# Altium PCB ControlBoard (1).PcbDoc (part 2 of 2)
Units mil, origin at the board's own origin, x right, y up, seen from the top; angles counter-clockwise.
Board outline 4736.14 x 4742.83 mil, 2 copper layers (Top Layer, Bottom Layer); 196 components, 148 nets, 699 pads, 226 vias.
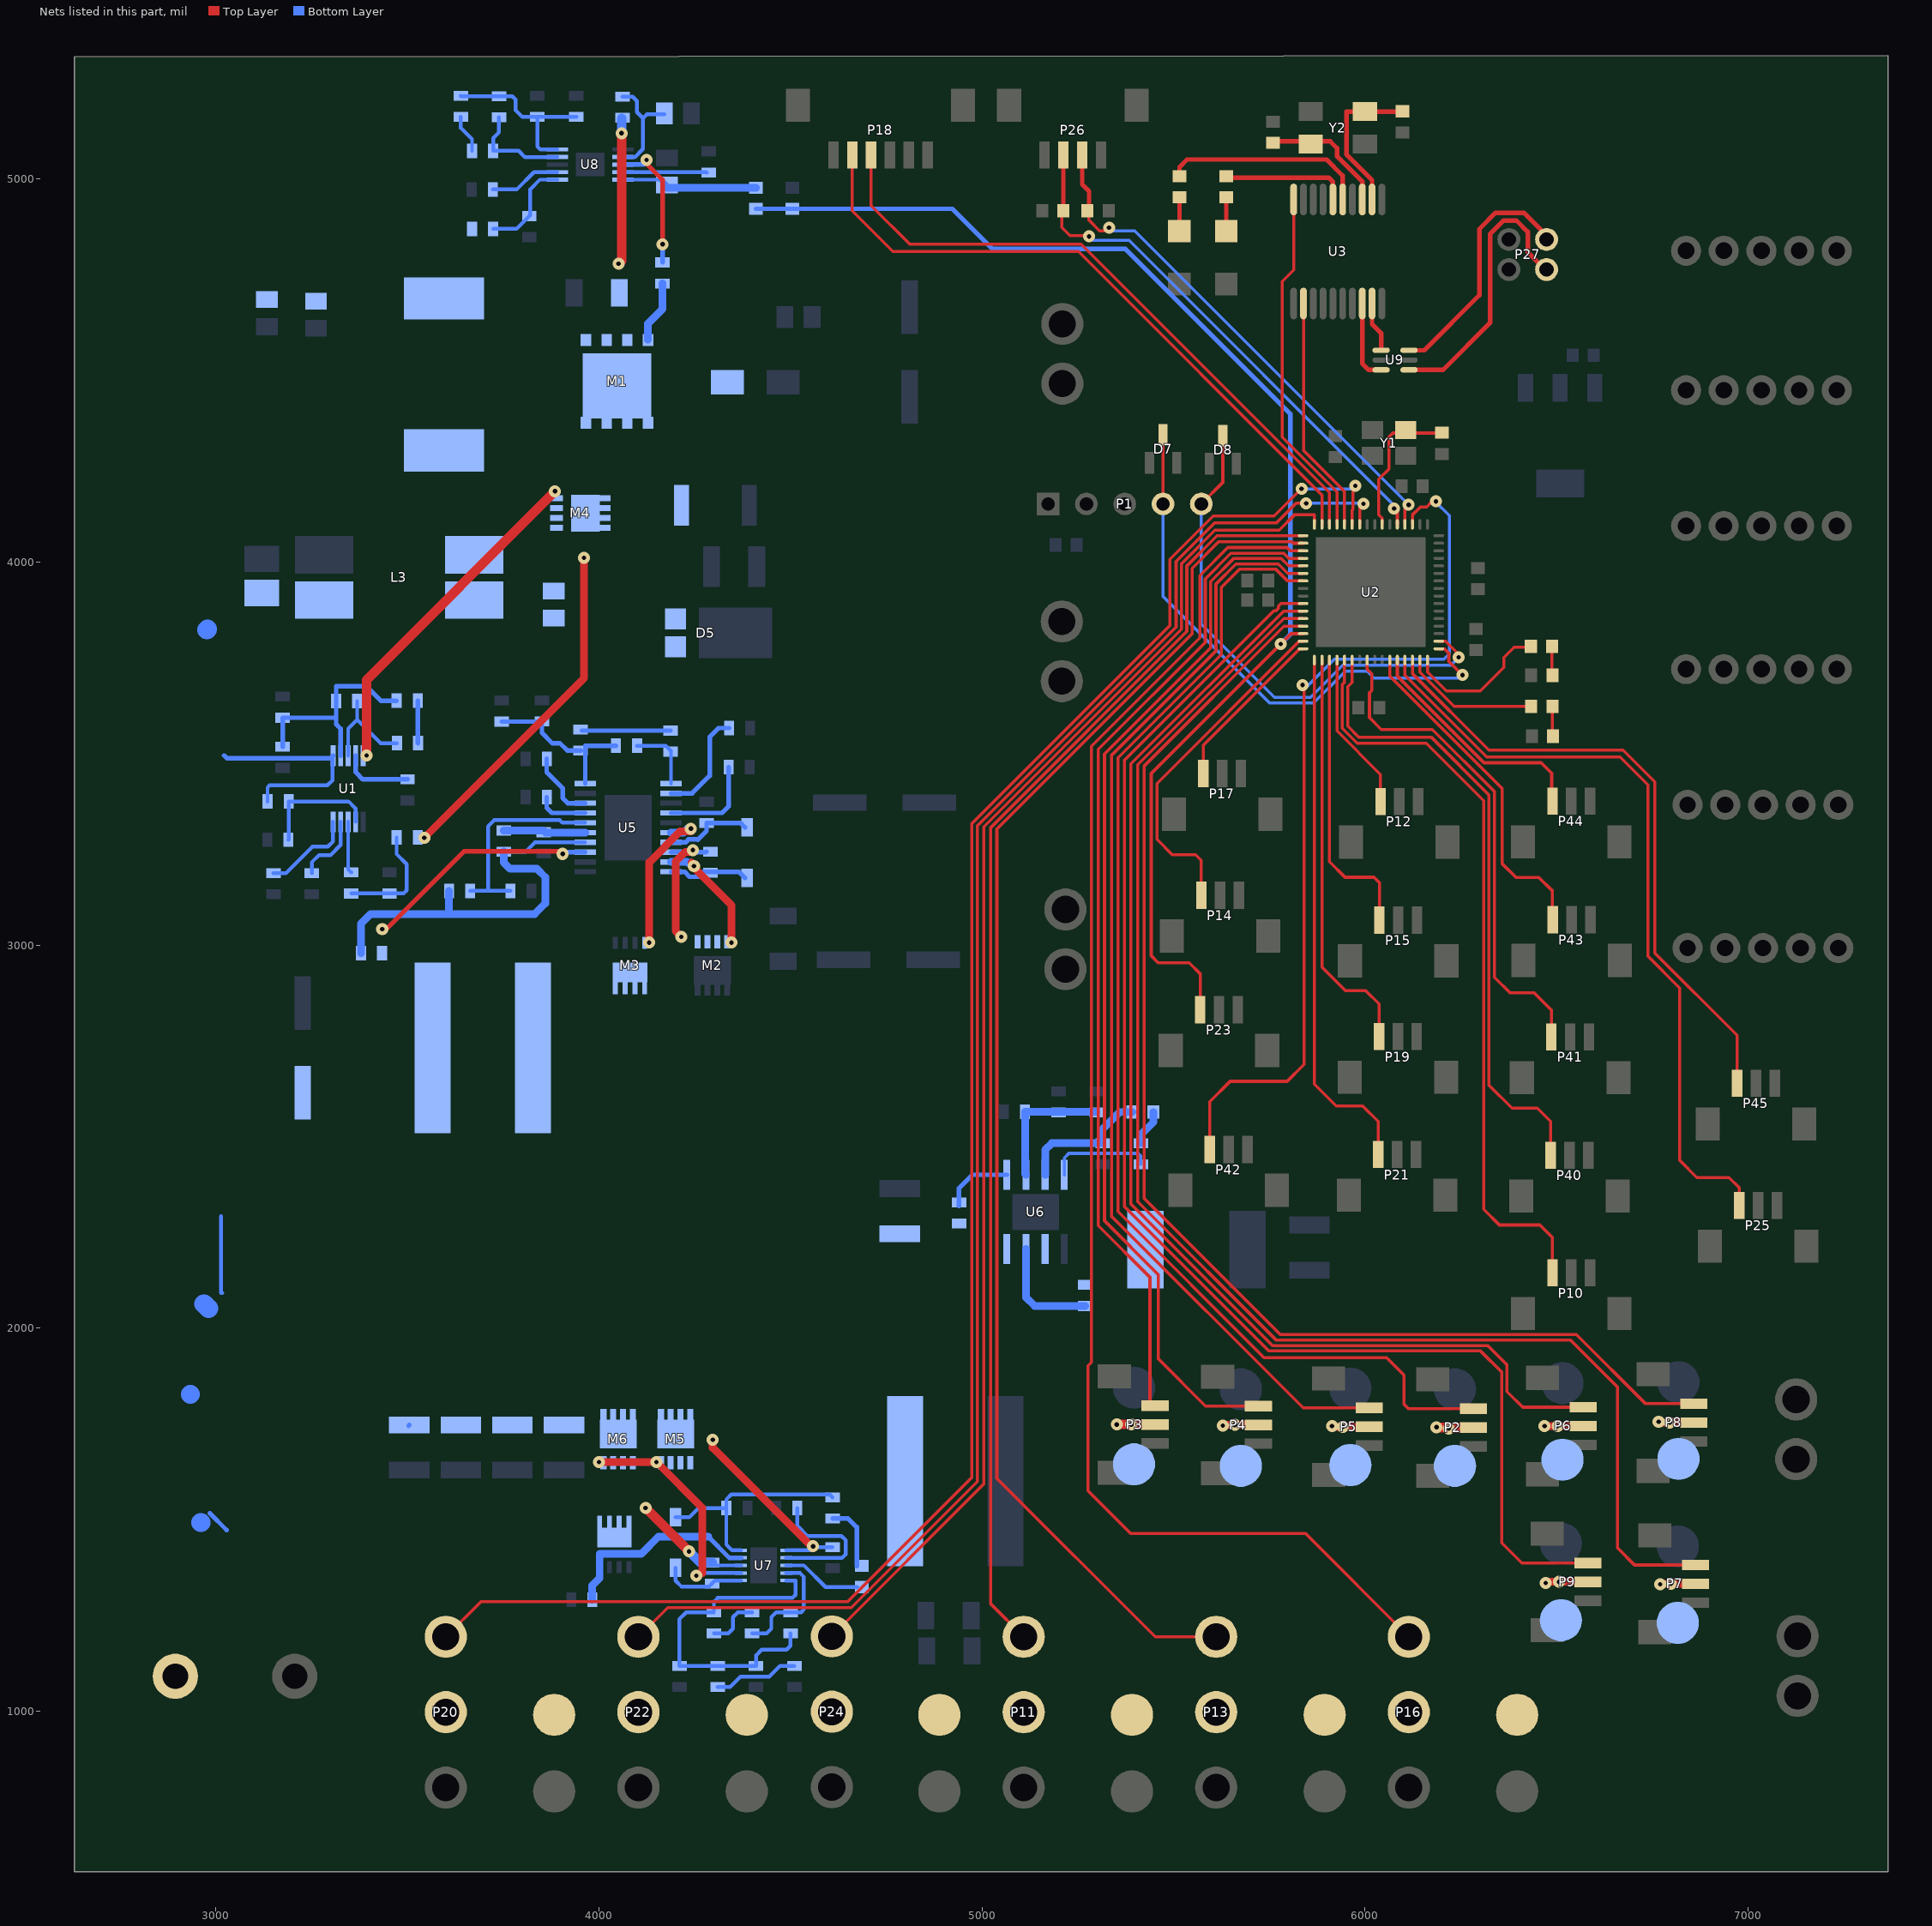
[diagram p2: the nets of this part, all layers, seen from the top]

## Via types
v1: diameter 31.5, hole 11.81, Top Layer to Bottom Layer, 205 vias
v2: diameter 59.06, hole 59.06, Top Layer to Bottom Layer, 6 vias
v3: diameter 78.74, hole 62.99, Top Layer to Bottom Layer, 5 vias
v4: diameter 157.48, hole 125.98, Top Layer to Bottom Layer, 4 vias
v5: diameter 118.11, hole 90.55, Top Layer to Bottom Layer, 2 vias
v6: diameter 62.99, hole 62.99, Top Layer to Bottom Layer, 1 vias
v7: diameter 50, hole 28, Top Layer to Bottom Layer, 1 vias
v8: diameter 50, hole 30, Top Layer to Bottom Layer, 1 vias
v9: diameter 32, hole 12, Top Layer to Bottom Layer, 1 vias

## Nets (pads, with @x,y where several pads share a name; then routed paths per layer and width w, separated by ;. In a path a pad name is that pad's centre, name@x,y a point inside that pad or via, vN(x,y) a via of type N, cw(c..) or ccw(c..) an arc to the next point about the centre after c; other vN are vias at no path point) (continued)
NetC8_2: C8.2 U2.39 Y1.1 | length 385.5
  Top Layer w8: U2.39@6045.28,4098.43 6045.28,4114.51 6036.25,4123.54 6036.25,4216.25 6062.99,4242.99 6062.99,4326.99 6073,4337 C8.2@6201,4337
NetC9_1: C9.1 U3.2 Y2.3 | length 403.7
  Top Layer w12: U3.2@6018.7,4946.85 6018.7,4997.3 5951.77,5064.23 5951.77,5176.18 Y2.3@6000,5176.18 C9.1@6098.43,5176.18
NetC10_1: C10.1 U3.3 Y2.1 | length 335.8
  Top Layer w12: C10.1@5759.84,5098.43 5909.45,5098.43 5926.98,5080.9 5926.98,5060.02 5993.11,4993.89 U3.3@5993.11,4946.85
NetC12_1: C12.1 C13.1 U8.4 | length 268.5
  Bottom Layer w10: C13.1@3739,5161.5 3739,5122 3723.5,5106.5 C12.1@3723.5,5074 3790,5074 3806.32,5057.69 U8.4@3891.37,5057.69
NetC12_2: C12.2 R8.1 | length 100.7
  Bottom Layer w10: R8.1@3639,5162.5 3639,5134 3668.5,5104.5 C12.2@3668.5,5074
NetC13_2: C13.2 R6.1 R7.2 R8.2 U8.5 | length 474.2
  Bottom Layer w10: R8.2@3639,5217.5 3640,5216.5 C13.2@3739,5216.5 3773.5,5216.5 3782,5208 3782,5180 3799.5,5162.5 R7.2@3839,5162.5 ; U8.5@3891.37,5077.37 3846.63,5077.37 3839,5085 R7.2@3839,5162.5 ; R6.1@3941,5162.5 R7.2@3839,5162.5
NetC17_1: C17.1 U8.2 | length 187.6
  Bottom Layer w10: C17.1@3722.5,4973 3785,4973 3830.32,5018.31 U8.2@3891.37,5018.31
NetC20_1: C20.1 R42.2 U8.7 | length 295.3
  Bottom Layer w10: R42.2@4061,5215.5 4087.5,5215.5 4099,5204 4099,5175 4115,5159 ; U8.7@4062.63,5057.69 4093.86,5057.69 4115,5078.83 4115,5159 ; C20.1@4170.5,5169 4125,5169 4115,5159
NetC21_1: C21.1 R10.2 U8.1 | length 260.7
  Bottom Layer w10: R10.2@3723.5,4870 3784.5,4870 C21.1@3818,4903.5 3820,4905.5 3820,4973 3845.63,4998.63 U8.1@3891.37,4998.63
NetC22_1: C22.1 U8.9 | length 220.1
  Bottom Layer w10: U8.9@4062.63,5018.31 4280.19,5018.31 C22.1@4282,5016.5
NetC23_1: C23.1 D4.1 U5.20 | length 210.4
  Bottom Layer w12: U5.20@4188,3191.34 4223.42,3191.34 4236.51,3178.25 4259.49,3178.25 4272.58,3191.34 4365.16,3191.34 D4.1@4381,3175.5
NetC23_2: C23.2 L2.2 M2.1 M2.2 M2.3 M3.5 M3.6 M3.7 M3.8 M3.9 U5.18 | length 360.9
  Top Layer w20: v1(4215,3021.5) 4200,3036.5 4200,3218 4225.5,3243.5 4243,3243.5 4245,3245.5 v1(4245,3248)
  Bottom Layer w12: U5.18@4188,3242.52 4242.02,3242.52 4245,3245.5 v1(4245,3248) ; v1@4243,3242.52 4279.52,3242.52 C23.2@4281,3244
NetC27_2: C27.2 D4.2 U5.17 | length 232.1
  Bottom Layer w12: U5.17@4188,3268.11 4225.87,3268.11 4233.51,3275.75 4256.49,3275.75 4257.62,3274.62 4281,3298 C27.2@4281,3319 4369.5,3319 D4.2@4381,3307.5
NetC28_1: C28.1 C31.1 R14.2 R17.1 U5.10 | length 428
  Bottom Layer w12: R17.1@3746,3583.5 3841.5,3583.5 3851,3574 3851,3554 3878.12,3526.88 3898.12,3526.88 3917,3508 C31.1@3952,3508 ; U5.10@3964,3421.66 3964,3520 3964.5,3520.5 C28.1@4044.5,3520.5
NetC28_2: C28.2 R16.1 U5.11 | length 179.4
  Bottom Layer w10: C28.2@4099.5,3520.5 4174.5,3520.5 4187,3508 4188,3507 U5.11@4188,3421.66
NetC30_1: C30.1 R13.1 U5.5 | length 215.2
  Bottom Layer w20: R13.1@3751,3299 3856,3299 3861.3,3293.7 U5.5@3964,3293.7
NetC31_2: C31.2 R16.2 | length 232
  Bottom Layer w12: C31.2@3955,3560 R16.2@4187,3560
NetC32_1: C32.1 U5.14 | length 260.1
  Bottom Layer w12: U5.14@4188,3344.89 4321.39,3344.89 4338.5,3362 C32.1@4338.5,3464.5
NetC33_1: C33.1 U5.7 | length 134.1
  Bottom Layer w12: C33.1@3863.5,3386.5 3863.5,3358.5 3877.11,3344.89 U5.7@3964,3344.89
NetC34_1: C34.1 D5.1 D5.2 L3.4
NetC34_2: C34.2 L3.3 M4.1 M4.2 M4.3
NetC37_1: C37.1 R23.2 R24.1 | length 297.5
  Bottom Layer w10: R23.2@3353,3134.5 C37.1@3453,3134.5 3489.5,3134.5 3498,3143 3498,3211 3471.5,3237.5 R24.1@3471.5,3281
NetC38_1: C38.1 U1.4 | length 186.3
  Bottom Layer w12: U1.4@3364.68,3494.5 3364.68,3451.32 3383.5,3432.5 C38.1@3500,3432.5
NetC39_1: C39.1 U1.10 | length 240.9
  Bottom Layer w10: C39.1@3150,3187.5 3182.5,3187.5 3251.91,3256.91 3291.91,3256.91 3305.63,3270.63 U1.10@3305.63,3321.5
NetC40_1: C40.1 C41.1 R21.2 R26.1 U1.2 | length 575.8
  Bottom Layer w12: R26.1@3174,3517.5 R21.2@3174,3593.5 3313,3593.5 3313.5,3594 ; U1.2@3325.32,3494.5 3325.32,3564.68 3313.5,3576.5 3313.5,3594 ; C40.1@3471.5,3638 3430,3638 3392,3676 3313.5,3676 C41.1@3313.5,3637 3313.5,3594
NetC40_2: C40.2 R29.2 | length 111.4
  Bottom Layer w12: C40.2@3526.5,3638 3526.5,3528 R29.2@3527.5,3527
NetC41_2: C41.2 R29.1 U1.3 | length 281.7
  Bottom Layer w10: U1.3@3345,3494.5 3345,3565 3368.5,3588.5 ; C41.2@3368.5,3637 3368.5,3588.5 ; R29.1@3472.5,3527 3430,3527 3368.5,3588.5
NetC42_1: C42.1 U6.7 | length 290.3
  Bottom Layer w20: U6.7@5115,2206 5115,2080 5137.5,2057.5 C42.1@5270,2057.5
NetC42_2: C42.2 L4.1 U6.6
NetC43_2: C43.2 R31.2 R33.1 U6.2 | length 351
  Bottom Layer w20: U6.2@5115,2400 5112.5,2402.5 R33.1@5112.5,2565 R31.2@5297.5,2565
NetC46_1: C46.1 D11.1 U6.3 | length 354.8
  Bottom Layer w20: U6.3@5165,2400 5165,2465 5182.5,2482.5 C46.1@5315,2482.5 5315,2519 5360,2564 D11.1@5392.44,2564
NetC52_1: C52.1 D6.2 R34.1 U7.10 | length 590.8
  Bottom Layer w10: D6.2@4200,1506 4236,1506 4260,1530 C52.1@4332.5,1530 ; U7.10@4370.94,1419.37 4347.63,1419.37 4332.5,1434.5 C52.1@4332.5,1530 ; R34.1@4610,1557.5 4602.5,1565 4345.19,1565 4332.5,1552.31 C52.1@4332.5,1530
NetC53_1: C53.1 D6.1 U7.6 | length 217.6
  Bottom Layer w10: D6.1@4200,1374 4200,1340 4215,1325 4287.5,1325 C53.1@4295,1332.5 4303.13,1340.63 U7.6@4370.94,1340.63
NetC53_2: C53.2 L5.1 M5.1 M5.2 M5.3 M6.1 M6.2 M6.3 pad.5 pad.6 pad.7 pad.8 pad.9 U7.8 | length 311.5
  Top Layer w25: v1(4121.59,1530) v1(4235,1416.59)
  Bottom Layer w10: C53.2@4295,1387.5 4302.5,1380 U7.8@4370.94,1380
  Bottom Layer w25: v1(4235,1416.59) 4264.09,1387.5 C53.2@4295,1387.5
NetC54_1: C54.1 U7.2 | length 385.7
  Bottom Layer w10: U7.2@4489.06,1399.68 4634.69,1399.68 4644,1409 4644,1446 4633.25,1456.75 4547.92,1456.75 4546.17,1455 4517.5,1483.67 C54.1@4517.5,1530
NetC55_1: C55.1 R35.2 | length 222.8
  Bottom Layer w10: C55.1@4310,1062.5 4342.5,1062.5 4370,1090 4445,1090 4472.5,1117.5 R35.2@4510,1117.5
NetC55_2: C55.2 C59.1 R36.2 R37.1 R39.2 U7.5 | length 890.3
  Bottom Layer w10: U7.5@4489.06,1340.63 4513.46,1340.63 4513.46,1303.46 4505,1295 4310,1295 4300,1285 R39.2@4300,1257.5 4227.5,1257.5 4210,1240 R37.1@4210,1117.5 C55.2@4310,1117.5 R36.2@4410,1117.5 4410,1145 4425,1160 4490,1160 4500,1170 C59.1@4500,1202.5
NetC58_1: C58.1 R39.1 | length 140.4
  Bottom Layer w10: R39.1@4300,1202.5 4337.5,1202.5 4350,1215 4350,1245 4362.5,1257.5 C58.1@4400,1257.5
NetC58_2: C58.2 C59.2 U7.4 | length 313.7
  Bottom Layer w10: C58.2@4400,1202.5 4437.5,1202.5 4450,1215 4450,1245 4462.5,1257.5 C59.2@4500,1257.5 4527.5,1257.5 4535,1265 4535,1350 4525,1360 4489.37,1360 U7.4@4489.06,1360.32
NetD1_2: D1.2 L1.2 M1.5 M1.6 M1.7 M1.8 M1.9
NetD2_1: D2.1 R4.2 | length 92.5
  Top Layer w12: D2.1@5515.75,4864.17 R4.2@5515.75,4956.69
NetD3_1: D3.1 R5.2 | length 92.5
  Top Layer w12: D3.1@5637.8,4864.17 R5.2@5637.8,4956.69
NetD9_1: D9.1 R43.2 | length 76
  Top Layer w8: R43.2@6489.56,3547 D9.1@6489.56,3623
NetD10_1: D10.1 R44.2 | length 75
  Top Layer w8: R44.2@6488.56,3705 D10.1@6488.56,3780
NetD11_2: D11.2 R32.1 | length 95
  Bottom Layer w20: R32.1@5415,2482.5 5415,2505 5447.56,2537.56 D11.2@5447.56,2564
NetD12_1: D12.1 U7.3 | length 209.4
  Bottom Layer w10: U7.3@4489.06,1380 4535,1380 4591.56,1323.44 D12.1@4675,1323.44
NetD12_2: D12.2 R34.2 | length 173.8
  Bottom Layer w12: R34.2@4610,1502.5 4650.5,1502.5 4673,1480 D12.2@4673,1378.56
NetF1_2: F1.2 P11.2
NetF2_1: F2.1 P2.2 | length 95
  Top Layer w25: v1@6188,1740 P2.2@6283,1740
  other v1: 6219,1737 6187,1741
NetF3_2: F3.2 P3.2 | length 100
  Top Layer w25: v1(5352,1748) P3.2@5452,1748
  other v1: 5390,1748
NetF4_2: F4.2 P4.2 | length 91
  Top Layer w20: v1@5631,1747 P4.2@5722,1747
  other v1: 5629,1745 5660,1747
NetF5_2: F5.2 P5.2 | length 95
  Top Layer w20: v1@5916,1742 P5.2@6011,1742
  other v1: 5942,1742 5914,1744
NetF6_2: F6.2 P6.2 | length 101
  Top Layer w20: v1(6469,1744) P6.2@6570,1744
  other v1: 6503,1744
NetF7_2: F7.2 P7.2 | length 91
  Top Layer w20: v1@6772,1332 P7.2@6863,1332
  other v1: 6771,1331 6799,1332
NetF8_2: F8.2 P8.2 | length 90
  Top Layer w20: v1@6769,1753 P8.2@6859,1753
  other v1: 6796,1753 6767,1755
NetF9_2: F9.2 P9.2 | length 107
  Top Layer w20: v1@6475,1337 P9.2@6582,1337
  other v1: 6472,1334 6507,1337
NetF10_2: F10.2 P13.2
NetF11_2: F11.2 P16.2
NetF12_2: F12.2 P20.2
NetF13_2: F13.2 P22.2
NetF14_2: F14.2 P24.2
NetL2_1: L2.1 R12.2 U5.3 | length 632.5
  Top Layer w12: v1(3434,3041.5) 3444.5,3041.5 3647.5,3244.5 3910,3244.5 3905,3239.5 v9(3905,3237.75)
  Bottom Layer w12: v9(3905,3237.75) 3905,3239.5 3910,3244.5 3911.98,3242.52 U5.3@3964,3242.52
NetM1_1: M1.1 M1.2 M1.3 R11.2 R42.1 | length 382.8
  Top Layer w25: v1(4051,4779) 4059,4787 v1(4059,5120)
  Bottom Layer w25: v1(4059,5120) R42.1@4059,5158.5
NetM1_4: M1.4 R9.1 | length 162.9
  Bottom Layer w20: M1.4@4127.91,4580.37 4127.91,4622.91 4166,4661 R9.1@4166,4727.5
NetM2_4: M2.4 U5.19 | length 317.2
  Top Layer w20: v1@4242,3215.5 4242,3207.5 4346,3103.5 v1(4346,3006.5)
  Bottom Layer w20: U5.19@4188,3216.93 4229.97,3216.93 4231.4,3215.5 4239.5,3215.5 4248,3207 v1(4248,3206)
NetM3_4: M3.4 U5.16 | length 417
  Top Layer w20: v1(4131,3006.5) 4131,3216 4211.5,3296.5 4241,3296.5 4240,3297.5 v1(4240,3304)
  Bottom Layer w20: U5.16@4188,3293.7 4220.35,3293.7 4230.65,3304 v1(4240,3304)
NetM4_4: M4.4 U1.5 | length 893.1
  Top Layer w25: v1(3393,3495) 3393,3692.29 v1@3885,4184.29
  other v1: 3885,4185
NetM4_5: M4.5 M4.6 M4.7 M4.8 M4.9 R24.2 R27.1 | length 903.7
  Top Layer w20: v1(3544,3280) 3961,3697 v1(3961,4011)
NetM5_4: M5.4 M6.4 U7.7 | length 617.7
  Top Layer w20: v1(4000,1650) v1(4150,1650) 4270,1530 4270,1359.82
  Bottom Layer w10: v1(4254,1353) 4250,1357 4253,1360 U7.7@4370.94,1360
NetM7_4: pad.4 R38.1 U7.9 | length 538.8
  Bottom Layer w12: 4285,1455 4340.31,1399.68 U7.9@4370.94,1399.68
  Bottom Layer w20: R38.1@3982.5,1290 3982.5,1327.5 4001.61,1346.61 pad.4@4001.61,1375.5 4001.61,1410 4110,1410 4155,1455 4285,1455
NetP26_2: P26.2 R2.1 U2.37 | length 1428.9
  Top Layer w8: R2.1@5208.66,4917.32 5208.66,4874.02 5230.19,4852.49 5277.43,4852.49 v1(5279.53,4850.39) ; v1(6076,4140) 6084.41,4140 6084.65,4139.76 U2.37@6084.65,4098.43
  Top Layer w12: R2.1@5208.66,4917.32 5212.6,4921.26 P26.2@5212.6,5062.99
  Bottom Layer w8: v1(5279.53,4850.39) 5289.92,4840 5384.41,4840 6084.41,4140 v1(6076,4140)
NetP26_3: P26.3 R3.1 U2.36 | length 1392.6
  Top Layer w8: R3.1@5279.53,4917.32 5279.53,4892.47 5307,4865 v1@5338.31,4865 ; U2.36@6104.33,4098.43 6104.33,4139.76 v1(6114.17,4149.61)
  Top Layer w12: P26.3@5261.81,5062.99 5261.81,4986.22 5279.53,4968.5 R3.1@5279.53,4917.32
  Bottom Layer w8: v1(5332,4873) 5332,4867 5330,4865 5398.78,4865 v1(6114.17,4149.61)
NetP27_2: P27.2 U9.4 | length 736.9
  Top Layer w12: U9.4@6115.16,4501.97 6203.97,4501.97 6326.77,4624.77 6326.77,4856.51 6362.26,4892 6395.4,4892 6425.2,4862.2 6425.2,4809.06 P27.2@6470.47,4763.78
NetP27_3: P27.3 U9.6 | length 642.1
  Top Layer w12: U9.6@6115.16,4553.15 6155.15,4553.15 6299,4697 6299,4870 6341,4912 6414.77,4912 6470.47,4856.3 P27.3@6470.47,4842.52
NetR4_1: R4.1 U3.5 | length 541.6
  Top Layer w12: R4.1@5515.75,5003.94 5515.75,5031.5 5535.43,5051.18 5899.82,5051.18 5941.93,5009.07 U3.5@5941.93,4946.85
NetR5_1: R5.1 U3.6 | length 329.3
  Top Layer w12: R5.1@5637.8,5003.94 5905.51,5003.94 5916.34,4993.11 U3.6@5916.34,4946.85
NetR9_2: R9.2 U8.8 | length 356.1
  Top Layer w12: v1(4124,5050) 4124,5046 4121,5043 4166,4998 v1(4166,4830)
  Bottom Layer w12: U8.8@4062.63,5038 4116,5038 4124,5046 v1(4124,5050) ; R9.2@4166,4782.5 v1(4166,4830)
NetR15_1: R15.1 R18.2 U5.6 | length 536.9
  Bottom Layer w10: R15.1@3663.5,3141.5 R18.2@3768.5,3141.5 ; 3710,3141.5 3710,3310 3726,3326 3897.26,3326 3903.97,3319.3 U5.6@3964,3319.3
NetR19_2: R19.2 U5.12 | length 281.6
  Bottom Layer w12: U5.12@4188,3396.07 4243.07,3396.07 4289,3442 4289,3543.5 4312,3566.5 R19.2@4339.5,3566.5
NetR20_2: R20.2 U5.8 | length 184.3
  Bottom Layer w12: R20.2@3863.5,3486.5 3863.5,3451.5 3905,3410 3905,3384 3918.52,3370.48 U5.8@3964,3370.48
NetR22_2: R22.2 U1.9 | length 182.8
  Bottom Layer w10: R22.2@3250,3187.5 3250,3216 3269,3235 3299,3235 3325.32,3261.32 U1.9@3325.32,3321.5
NetR23_1: R23.1 U1.8 | length 135.3
  Bottom Layer w10: U1.8@3345,3321.5 3345,3197.5 R23.1@3353,3189.5
NetR25_1: R25.1 R28.2 U1.7 | length 318.2
  Bottom Layer w10: R28.2@3188.5,3275 3189.5,3276 R25.1@3189.5,3375 3346,3375 3364.68,3356.32 U1.7@3364.68,3321.5
NetR30_1: R30.1 U6.1 | length 185.7
  Bottom Layer w12: R30.1@4940,2318.75 4940,2365 4975,2400 U6.1@5065,2400
NetR32_2: R32.2 U6.4 | length 273.4
  Bottom Layer w8: U6.4@5215,2400 5215,2444 5227,2456 5408,2456 5415,2449 R32.2@5415,2427.5
NetU3_18: U3.18 U9.3 | length 212.6
  Top Layer w12: U3.18@5993.11,4675.2 5993.11,4518.7 6009.84,4501.97 U9.3@6042.32,4501.97
NetU3_19: U3.19 U9.1 | length 131.8
  Top Layer w12: U3.19@6018.7,4675.2 6018.7,4621.06 6042.32,4597.44 U9.1@6042.32,4553.15
PGEC: D7.3 P1.4 U2.17 | length 1466.3
  Top Layer w8: P1.4@5473,4152.06 D7.3@5473,4331.42 ; U2.17@6192.91,3773.62 6207.38,3773.62 6219,3762 6219,3740.84 6254.84,3705 v1(6255,3705)
  Bottom Layer w8: P1.4@5472.75,4151.81 5472.75,3910.25 5751,3632 5866,3632 5949,3715 6006,3715 6023.81,3697.19 6247.19,3697.19 v1(6255,3705)
PGED: D8.3 P1.5 U2.18 | length 1415.1
  Top Layer w8: P1.5@5572.75,4151.81 5629,4208.06 D8.3@5629,4329.42 ; U2.18@6192.91,3793.31 6210.63,3793.31 6245,3758.94 6245,3749.61 6248.73,3745.88 6250.54,3745.88 6245.16,3751.26 v1(6245,3751.26)
  Bottom Layer w8: P1.5@5572.75,4151.81 5572.75,3838.25 5764,3647 5858,3647 5942,3731 6224.74,3731 v1(6245,3751.26) ; v1(6245,3751.26) 6245.16,3751.26 6250.54,3745.88 6250.38,3745.88 v1(6245,3751.26)
RX0: U2.44 U3.12 | length 621.2
  Top Layer w8: U3.12@5839.57,4675.2 5839.57,4291.43 5946.85,4184.15 U2.44@5946.85,4098.43
RX1: P18.3 U2.46 | length 1722.3
  Top Layer w8: P18.3@4710.63,5062.99 4710.63,4931.1 4811.73,4830 5259,4830 5907.48,4181.52 U2.46@5907.48,4098.43
SA0: P11.1 U2.49 | length 3380
  Top Layer w8: P11.1@5108.8,1193.65 5023.09,1279.36 5023.09,3306.89 5535,3818.8 5535,3989.8 5614.1,4068.9 U2.49@5838.58,4068.9
SA1: P13.1 U2.50 | length 3652.4
  Top Layer w8: P13.1@5611.74,1193.65 5452.35,1193.65 5039,1607 5039,3303 5549,3813 5549,3984 5618.53,4053.53 5809,4053.53 5813.31,4049.21 U2.50@5838.58,4049.21
SA2: P16.1 U2.51 | length 3809.9
  Top Layer w8: U2.51@5838.58,4029.53 5838.2,4029.91 5804.64,4029.91 5796.55,4038 5642,4038 5569,3965 5569,3802 5286,3519 5286,1910.1 5277,1901.1 5277,1575 5389,1463 5845.33,1463 P16.1@6114.67,1193.65
SA3: P20.1 U2.43 | length 4825.9
  Top Layer w8: P20.1@3600,1193.65 3691.35,1285 4649,1285 4973,1609 4973,3316.2 5491,3834.2 5491,4007 5604,4120 5763,4120 5820.16,4177.16 v1(5834.63,4191.16) ; U2.43@5966.54,4098.43 5966.54,4135.85 5968.49,4137.81 5968.49,4192.49 v1(5975,4199)
  Bottom Layer w8: v1(5834.63,4191.16) 5968.49,4191.16 5975,4197.66 v1(5975,4199)
SA4: P22.1 U2.42 | length 4287.4
  Top Layer w8: P22.1@4102.94,1193.65 4179.28,1270 4659,1270 4988,1599 4988,3311.4 5507,3830.4 5507,4001.4 5607.6,4102 5769,4102 5820.54,4153.54 v1(5846.46,4153.54) ; U2.42@5986.22,4098.43 5986.22,4151.57 5988.19,4153.54 5989.73,4152 v1(5996,4152)
  Bottom Layer w8: v1(5846.46,4153.54) 5994.46,4153.54 v1(5996,4152)
SA5: P24.1 U2.48 | length 3606.9
  Top Layer w8: P24.1@4605.87,1193.65 5005,1592.78 5005,3308.6 5521,3824.6 5521,3995.6 5608.4,4083 5775.91,4083 5816.93,4124.02 5868.11,4124.02 U2.48@5868.11,4098.43
SA6: P14.1 U2.63 | length 911.1
  Top Layer w8: P14.1@5572.79,3130 5572.79,3221.21 5558,3236 5497,3236 5457,3276 5457,3422 5828.31,3793.31 U2.63@5838.58,3793.31
SA7: P17.1 U2.64 | length 438.9
  Top Layer w8: P17.1@5577.79,3448 5577.79,3521.79 5829.62,3773.62 U2.64@5838.58,3773.62
SC0: P2.1 U2.55 | length 3173.2
  Top Layer w8: U2.55@5838.58,3950.79 5798.21,3950.79 5768,3981 5672,3981 5625,3934 5625,3759 5355,3489 5355,2304 5736.62,1922.38 6056.62,1922.38 6102,1877 6102,1801 6113.79,1789.21 P2.1@6283,1789.21
SC1: P3.1 U2.52 | length 2621.5
  Top Layer w8: P3.1@5445,1797.21 5438.67,1803.54 5438.67,2132.33 5304,2267 5304,3511 5583,3790 5583,3956 5650,4023 5788,4023 5801.16,4009.84 U2.52@5838.58,4009.84
SC2: P4.1 U2.53 | length 2789.2
  Top Layer w8: P4.1@5722,1796.21 5583.79,1796.21 5460,1920 5460,2140 5320,2280 5320,3499 5597,3776 5597,3949 5657,4009 5782,4009 5800.84,3990.16 U2.53@5838.58,3990.16
SC3: P5.1 U2.54 | length 2903.8
  Top Layer w8: U2.54@5838.58,3970.47 5798.53,3970.47 5774,3995 5663,3995 5611,3943 5611,3768 5338,3495 5338,2292 5838.79,1791.21 P5.1@6011,1791.21
SC4: P6.1 U2.59 | length 3205.7
  Top Layer w8: U2.59@5838.58,3872.05 5788.05,3872.05 5389,3473 5389,2324 5759,1954 6321,1954 6371,1904 6371,1834 6411.79,1793.21 P6.1@6570,1793.21
SC5: P7.1 U2.60 | length 3825.8
  Top Layer w8: U2.60@5838.58,3852.36 5788.36,3852.36 5407,3471 5407,2330 5769,1968 6537.33,1968 6660,1845.33 6660,1425 6703.79,1381.21 P7.1@6863,1381.21
SC6: P8.1 U2.61 | length 3352.6
  Top Layer w8: U2.61@5838.58,3832.68 5788.68,3832.68 5424,3468 5424,2338 5779,1983 6552,1983 6732.79,1802.21 P8.1@6859,1802.21
SC7: P9.1 U2.58 | length 3661.8
  Top Layer w8: U2.58@5838.58,3891.73 5780.98,3891.73 5773.72,3884.47 5773.72,3878.91 5767.86,3873.05 5762.3,3873.05 5372,3482.75 5372,2317 5749,1940 6302,1940 6357,1885 6357,1439 6409.79,1386.21 P9.1@6582,1386.21
SD0: P10.1 U2.5 | length 1997.5
  Top Layer w8: U2.5@5946.85,3744.09 5946.85,3686.31 5941,3680.46 5941,3565.79 5979.79,3527 6160,3527 6310,3377 6310,2310 6351,2269 6457,2269 6489.79,2236.21 P10.1@6489.79,2144
SD1: P12.1 U2.4 | length 416.3
  Top Layer w8: U2.4@5927.17,3744.09 5927.19,3686.45 5927,3686.26 5927,3559 6040.79,3445.21 P12.1@6040.79,3375
SD2: P15.1 U2.3 | length 777.6
  Top Layer w8: U2.3@5907.48,3744.09 5907.48,3217.52 5948,3177 6024,3177 6037.79,3163.21 P15.1@6037.79,3065
SD3: P19.1 U2.2 | length 1075.9
  Top Layer w8: U2.2@5887.8,3744.09 5887.8,3605.15 5888,3604.94 5888,2942 5949,2881 6002,2881 6036.79,2846.21 P19.1@6036.79,2761
SD4: P21.1 U2.1 | length 1400.6
  Top Layer w8: U2.1@5868.11,3744.09 5868.11,2636.89 5925.11,2579.89 5994.11,2579.89 6034.79,2539.21 P21.1@6034.79,2453
SD5: P23.1 R40.1 R41.2 U2.62 | length 3493.3
  Top Layer w8: P23.1@5569.79,2831 5569.79,2925.21 5541,2954 5460,2954 5442,2972 5442,3448 v1(5780,3786) 5806.99,3812.99 U2.62@5838.58,3812.99
  Bottom Layer w12: R40.1@4410,4922.44 R41.2@4505,4922.44 4922.56,4922.44 5027,4818 5374,4818 5805,4387 5805,3811 v1(5780,3786)
SD6: P25.1 U2.13 | length 2039
  Top Layer w8: U2.13@6104.33,3744.09 6104.33,3704.67 6318,3491 6666,3491 6739,3418 6739,2971 6822.09,2887.91 6822.09,2437.91 6867,2393 6951,2393 6977.79,2366.21 P25.1@6977.79,2320
SP0: P40.1 U2.6 | length 1666.9
  Top Layer w8: U2.6@5966.54,3744.09 5966.54,3686.2 5955.09,3674.76 5955.09,3571.5 5983.59,3543 6173,3543 6324,3392 6324,2634 6384,2574 6450,2574 6484.79,2539.21 P40.1@6484.79,2451
SP1: P41.1 U2.8 | length 1303
  Top Layer w8: U2.8@6005.91,3744.09 6005.91,3720.09 6017.75,3708.25 6017.75,3664.33 6011.81,3658.4 6011.81,3594.19 6043,3563 6176,3563 6338.09,3400.91 6338.09,2915.91 6379,2875 6442,2875 6486.79,2830.21 P41.1@6486.79,2760
SP2: P42.1 U2.35 | length 2325.6
  Top Layer w8: P42.1@5594.79,2466 5594.79,2590.79 5648,2644 5797,2644 5841,2688 5841,3675 v1(5837,3679) ; U2.35@6124.02,4098.43 6124.02,4123.04 6144.98,4144 6161,4144 v1@6172,4155
  Bottom Layer w8: v1(5837,3679) 5845,3671 5920,3746 6206,3746 6219.25,3759.25 6219.25,3761.92 6220.47,3763.14 6220.47,4121.53 v1@6184.49,4157.51
  other v1: 6185.49,4158.51
SP3: P43.1 U2.11 | length 878.2
  Top Layer w8: U2.11@6064.96,3744.09 6064.96,3702.04 6358,3409 6358,3213 6395,3176 6455,3176 6489.79,3141.21 P43.1@6489.79,3077
SP4: P44.1 U2.12 | length 606.4
  Top Layer w8: U2.12@6084.65,3744.09 6084.71,3744.03 6084.71,3702.29 6311,3476 6460,3476 6487.79,3448.21 P44.1@6487.79,3392
SP5: P45.1 U2.14 | length 1661.3
  Top Layer w8: U2.14@6124.02,3744.09 6124.02,3708.98 6324,3509 6674,3509 6757.09,3425.91 6757.09,2979 6971.79,2764.31 P45.1@6971.79,2639
SP6: D9.2 U2.15 | length 359.4
  Top Layer w8: U2.15@6143.7,3744.09 6143.7,3712.5 6233.2,3623 D9.2@6434.44,3623
SP7: D10.2 U2.16 | length 382.6
  Top Layer w8: U2.16@6163.39,3744.09 6163.39,3712.61 6212.61,3663.39 6301.39,3663.39 6363,3725 6363,3751 6390,3778 D10.2@6431.44,3778
TX0: U2.45 U3.10 | length 920.1
  Top Layer w8: U3.10@5813.98,4946.85 5813.98,4762.98 5784,4733 5784,4326 5927.17,4182.83 U2.45@5927.17,4098.43
TX1: P18.2 U2.47 | length 1756.2
  Top Layer w8: P18.2@4661.42,5062.99 4661.42,4917.32 4767.72,4811.02 5251.98,4811.02 5887.8,4175.2 U2.47@5887.8,4098.43
VBAT: C15.1 C16.1 C19.1 C29.1 C36.1 C44.1 C47.1 C48.1 C49.1 C50.1 C51.1 L1.1 L3.1 M5.5 M5.6 M5.7 M5.8 M5.9 M6.5 M6.6 M6.7 M6.8 M6.9 P34.1 R10.1 R12.1 R13.2 R15.2 R25.2 R30.2 R40.2 U1.1 U5.4 U6.8 U7.1 U8.10 | length 2811.8
  Top Layer w20: v1(4297,1708) 4297,1687 4559,1425 v1(4559,1430)
  Bottom Layer w10: 3012.76,2291.97 3012.76,2091.24 3016.69,2091.24 ; R25.2@3134.5,3375 3134.5,3411.5 3140,3417 3291,3417 3304,3430 U1.1@3304,3492.87 ; R13.2@3751,3244 3808.58,3244 3832.48,3267.91 3963.79,3267.91 U5.4@3964,3268.11 ; U8.10@4062.63,4998.63 4157.87,4998.63 C19.1@4170,4986.5 ; U7.1@4489.06,1419.37 v1@4559.37,1419.37 ; v1@4562,1422 4567.5,1427.5 C51.1@4610,1427.5
  Bottom Layer w12: 2984.25,1515.75 3027.56,1472.44 ; 3021,3495 3028,3488 3299.13,3488 U1.1@3305.63,3494.5 ; C47.1@3502.89,1744.8 C47.1@3504.85,1746.77
  Bottom Layer w20: R12.1@3378.5,2979 3378.5,3055.5 3404,3081 3832,3081 3860,3109 3860,3177 3838,3199 3768,3199 3751,3216 R13.2@3751,3244 ; 3608.5,3081.5 R15.2@3608.5,3141.5 ; C19.1@4170,4986.5 4178.94,4977.56 R40.2@4410,4977.56
  Bottom Layer w50: 2968.5,2062.99 2980.26,2051.24 ; 2976.38,3822.83 2977.91,3824.36
pads on no net: P2.NC P3.NC P4.NC P5.NC P6.NC P7.NC P8.NC P9.NC P10.2 P10.NC P12.2 P12.NC P14.2 P14.NC P15.2 P15.NC P17.2 P17.NC P18.4 P18.5 P18.NC P19.2 P19.NC P21.2 P21.NC P23.2 P23.NC P25.2 P25.NC P26.NC P28.4 P29.4 P30.4 P31.4 P32.4 P33.4 P40.2 P40.NC P41.2 P41.NC P42.2 P42.NC P43.2 P43.NC P44.2 P44.NC P45.2 P45.NC U3.7 U3.8 U3.9 U3.11 U3.13 U3.14 U3.15 U3.16 U5.1 U8.3 Y1.2 Y1.4 Y2.2 Y2.4
copper on no net:
  other v2: 3670.87,678.89 4173.8,678.89 5179.67,678.89 5682.61,678.89 6185.54,678.89 4678.87,680.09
  other v3: 7001.97,1254.33 6998.03,1872.44 5090.05,3151.96 5080.71,3903.94 5082.05,4680.96
  other v4: 2767.72,704.72 7188.98,720.47 7200.79,5153.54 2748.03,5165.35
  other v5: 6188.98,4909.84 6661.42,4909.84
  other v6: 3341.34,1261.81

## Polygon pours and split planes (outlines as drawn)
GND on Bottom Layer "bottom_gnd" (solid, remove dead copper, pour order 4): 7366.14,5307.09 2657.48,5307.09 2649.61,5314.96 2641.73,5307.09 2641.73,590.55 7346.46,590.55 7354.33,582.68
24V on Bottom Layer "bottom_gnd" (solid, remove dead copper, pour order 41): 4384,4739 4386,4737 4522,4737 4522,4550 4521,4549 4530,4540 5533,4540 5533,4199 5386,4199 4482,4196 4387,4291
NetL2_1 on Bottom Layer "bottom_gnd" (solid, remove dead copper, pour order 49): 3404,3024.48 3410,3031 3632,3027.74 3631,2751.59 3628,2471.09 3459,2473.26 3434,2470 3404,2475.44
NetC42_2 on Bottom Layer "bottom_gnd" (solid, remove dead copper, pour order 25): 5140,2250 5140,2120 5180,2080 5520,2080 5520,2314 5367,2314 5367,2211 5299,2156 5225,2155 5195,2155 5195,2250
NetC53_2 on Bottom Layer "bottom_gnd" (solid, remove dead copper, pour order 15): 4999,1846 4457,1846 4380,1769 4380,1670 3975,1670 3895,1668 3825,1579 3391,1483 3391,1337 3380,1085 3890,1106 3898,1319 4000,1320 4014,1359 4230,1575 4640,1575 4640,1465 4770,1335 4999,1335
NetM4_5 on Bottom Layer "bottom_gnd" (solid, remove dead copper, pour order 35): 3910.13,4228 3910.13,4267 4002,4267 4002,4279 4020,4297 4307,4297 4307,4078 4310,4075 4310,3860 3922,3860 3907,3845
NetC23_2 on Bottom Layer "bottom_gnd" (solid, remove dead copper, pour order 26): 4321,3031.5 4321,2981.5 4311,2971.5 4171,2971.5 4171,2946.5 4161,2936.5 4121,2936.5 4121,2961.5 4146,2986.5 4146,3036.5 4321,3036.5
19V on Bottom Layer "bottom_gnd" (solid, remove dead copper, pour order 24): 4200,2975 4205,2970 4395,2970 4405,2970 4450,3015 4455,3020 4550,3020 4550,2930 4565,2915 4770,2915 4770,3680 4955,3495 5335,3495 5335,2995 5345,2985 5085,2985 5085,2720 4940,2575 4790,2425 4710,2425 4710,2200 4715,2195 4695,2175 4200,2175
7V4 on Bottom Layer "bottom_gnd" (solid, remove dead copper, pour order 16): 5160,1846.9 4980,1846.9 4980,1343.22 4925,1289.94 4925,834.69 3395,834.69 3385,825 3385,611.9 6835,611.9 7260,1023.57 7255,1028.41 7255,1115.59 6540,1115.59 6240,825 5465,825 5465,1551.47 5160,1846.9
NetC34_1 on Bottom Layer "bottom_gnd" (solid, remove dead copper, pour order 31): 3564,3961 3566,3963 3786,3963 3786,3934 3832,3888 3838,3894 4232,3894 4245.53,3894 4246.53,3895 4248,3893.53 4248,3682 3564,3682 3563,3683
12V on Bottom Layer "bottom_gnd" (solid, remove dead copper, pour order 29): 4354,3894 4353,4052 4247,4052 4248,3682 4928,3529 5125,3531 5553,3531 5553,3762 5555,3764 5553,3766 5030,3835 4868,3895
NetM1_1 on Bottom Layer "bottom_gnd" (solid, remove dead copper, pour order 39): 4001,4804 4099,4804 4100,4805 4100,4558 3937,4558 3937,4628 3982,4628 4001,4647
NetD1_2 on Bottom Layer "bottom_gnd" (solid, remove dead copper, pour order 43): 3398,4325 3402,4329 3402,4546 4380,4546 4391,4557 4393,4555 4393,4300 4019,4300 3971,4252 3920,4201 3400,4201
VBAT on Bottom Layer "bottom_gnd" (solid, remove dead copper, pour order 45): 3033,4753 3456,4753 3623,4920 3701,4920 3701,4830 3723,4808 3871,4809 3874,4901 3924,4901 4032,5009 4207,5009 4207,4966 4220,4953 4075,4808 4008,4762 3982,4743 3965,4743 3890,4703 3825,4703 3725,4606 3353,4606 3315,4644 3313,4642 3023,4642
NetC23_2 on Bottom Layer "bottom_gnd" (solid, remove dead copper, pour order 22): 3409,1957 3411,2472 3635,2478 3635,2964 3720,2965 3725,2970 4190,2970 4207,1942
NetC34_2 on Bottom Layer "bottom_gnd" (solid, remove dead copper, pour order 33): 3049,3670 3051,3841 3386,3842 3383,3974 3365,4131 3289,4226 3913,4220 3907,4214 3907,4022 3909,4022 3948,3983 3946,3981 3946,3892 3568.7,3892 3563.73,3887.04 3555,3688
VBAT on Bottom Layer "bottom_gnd" (solid, remove dead copper, pour order 47): 5054,2298 5092,2260 5149,1858 4493,1791 4380,1670 3009,1665 3009,2722 3002,2729 3015,2742 3294,2742 3294,2995 3324,3025 3404,3025 3409,1957 3693,1948 4207,1942 4212,2161 4729,2297
5V-HC on Bottom Layer "bottom_gnd" (solid, remove dead copper, pour order 28): 5971,2206 5784,2206 5776,2214 5774,2216 5774,2358 5600,2358 5594,2352 5582,2340 5582,1978 5259,1978 5250,1969 5250,1767 5276,1767 5667,1376 5681,1362 7231,1362 7231,1711 7217,1725 7212,1730 6950,1730 6950,1938 6913,1975 6845,2043 5965,2043
GND on Top Layer "top_gnd" (solid, remove dead copper, pour order 2): 7374.02,5322.83 7366.14,5314.96 2641.73,5314.96 2641.73,590.55 7354.33,590.55
NetF11_2 on Top Layer "bottom_gnd" (solid, remove dead copper, pour order 17): 6470,1077 6045,1077 6045,902 6470,902
NetF10_2 on Top Layer "bottom_gnd" (solid, remove dead copper, pour order 18): 5962.5,1077 5537.5,1077 5537.5,902 5962.5,902
NetF1_2 on Top Layer "bottom_gnd" (solid, remove dead copper, pour order 19): 5460,1077 5035,1077 5035,902 5460,902
NetF14_2 on Top Layer "bottom_gnd" (solid, remove dead copper, pour order 20): 4960,1077 4535,1077 4535,902 4960,902
NetF12_2 on Top Layer "bottom_gnd" (solid, remove dead copper, pour order 21): 3955,1082 3530,1082 3530,907 3955,907
NetF13_2 on Top Layer "bottom_gnd" (solid, remove dead copper, pour order 23): 4450,1087 4025,1087 4025,912 4450,912

## Other copper
Top Layer:
  rectangle net NetF11_2: 6056,927 6462,1056
  rectangle net NetF10_2: 5555,936 5957,1058
  rectangle net NetF1_2: 5053,935 5456,1058
  rectangle net NetF14_2: 4546,932 4970,1058
  rectangle net NetF13_2: 4044,932 4462,1059
  rectangle net NetF12_2: 3541,923 3952,1058
  rectangle net 7V4: 6315,662 6485,857
  rectangle net 7V4: 5815,662 5985,857
  rectangle net 7V4: 5305,657 5475,852
  rectangle net 7V4: 4810,667 4980,862
  rectangle net 7V4: 4300,672 4470,867
  rectangle net 7V4: 3800,667 3970,862
Bottom Layer:
  rectangle net VBAT: 2677,842.52 3055,4996.06
  rectangle net VBAT: 3000,3842 3386,3959
  rectangle net NetF8_2: 6741,1600 6891,1782
  rectangle net NetF6_2: 6441,1590 6583,1771
  rectangle net NetF2_1: 6162,1566 6302,1763
  rectangle net NetF5_2: 5894,1573 6029,1761
  rectangle net NetF4_2: 5610,1573 5741,1763
  rectangle net NetF3_2: 5329,1582 5462,1778
  rectangle net NetF7_2: 6750,1163 6882,1352
  rectangle net NetF9_2: 6447,1167 6577,1352
  region: 4040,1360

## Silkscreen, mask and mechanical layers (free items; w line width, h text height)
Top Overlay:
  circle w4.88: c3228,5053.71 r101.61
  lines w3.25: 3158.37,4963.86 cw(c3268.64,5053.71) 3160.36,5145.96 ; 3163.14,4937.16 cw(c3329.61,5053.71) 3163.14,5170.27
  lines w6.5: 3157.6,5013.07 3228,4972.43 3298.4,5013.07 ; 3157.6,5013.07 3157.6,5094.36 3228,5135 ; 3157.6,5013.07 3228,5053.71 ; 3228,5053.71 3298.4,5013.07 ; 3228,5053.71 3228,5135 ; 3228,5135 3298.4,5094.36 3298.4,5013.07
  text "BLUESAT" at 3359.32,5062.12 h65.03
  text "Bluetongue" at 3358.06,5013.07 h65.03
Bottom Overlay:
  circle w10: c4125,1375 r5
  circle w4.88: c6877.39,850 r101.61
  lines w3.25: 6945,733 ccw(c6778.54,849.56) 6945,966.12 ; 6946.01,758.9 ccw(c6837.72,851.14) 6948,941
  lines w6: 3982.01,1368 3973,1368 3973,1502 3982.01,1502 ; 4097.99,1368 4107,1368 4107,1502 4097.99,1502
  lines w6.5: 6808.55,808 6878.94,767.36 6949.34,808 ; 6808.55,808 6808.55,889.29 6878.94,929.93 ; 6808.55,808 6878.94,848.64 ; 6878.94,848.64 6949.34,808 ; 6878.94,848.64 6878.94,929.93 ; 6878.94,929.93 6949.34,889.29 6949.34,808
  text "BLUESAT" at 6740.26,858.05 h65.03
  text "Bluetongue" at 6739,809 h65.03
  text "S.M 6/15" at 6739,760 h45.03
Bottom Paste:
  region: 4084.89,1391 4084.89,1360 4071.89,1360 4071.89,1391
  region: 4059.3,1391 4059.3,1360 4046.3,1360 4046.3,1391
  region: 4033.7,1391 4033.7,1360 4020.7,1360 4020.7,1391
  region: 4008.11,1391 4008.11,1360 3995.11,1360 3995.11,1391
  region: 4008.11,1510 4008.11,1479 3995.11,1479 3995.11,1510
  region: 4033.7,1510 4033.7,1479 4020.7,1479 4020.7,1510
  region: 4059.3,1510 4059.3,1479 4046.3,1479 4046.3,1510
  region: 4084.89,1510 4084.89,1479 4071.89,1479 4071.89,1510
  region: 4040,1360
Bottom Solder:
  rectangle: 2681,859 3037,4989
  region: 4040,1360